# Altium PCB Prod_V2.PcbDoc
Units mil, origin at the board's own origin, x right, y up, seen from the top; angles counter-clockwise.
Board outline 4635 x 4495 mil, 2 copper layers (Top Layer, Bottom Layer); 140 components, 0 nets, 480 pads, 120 vias.
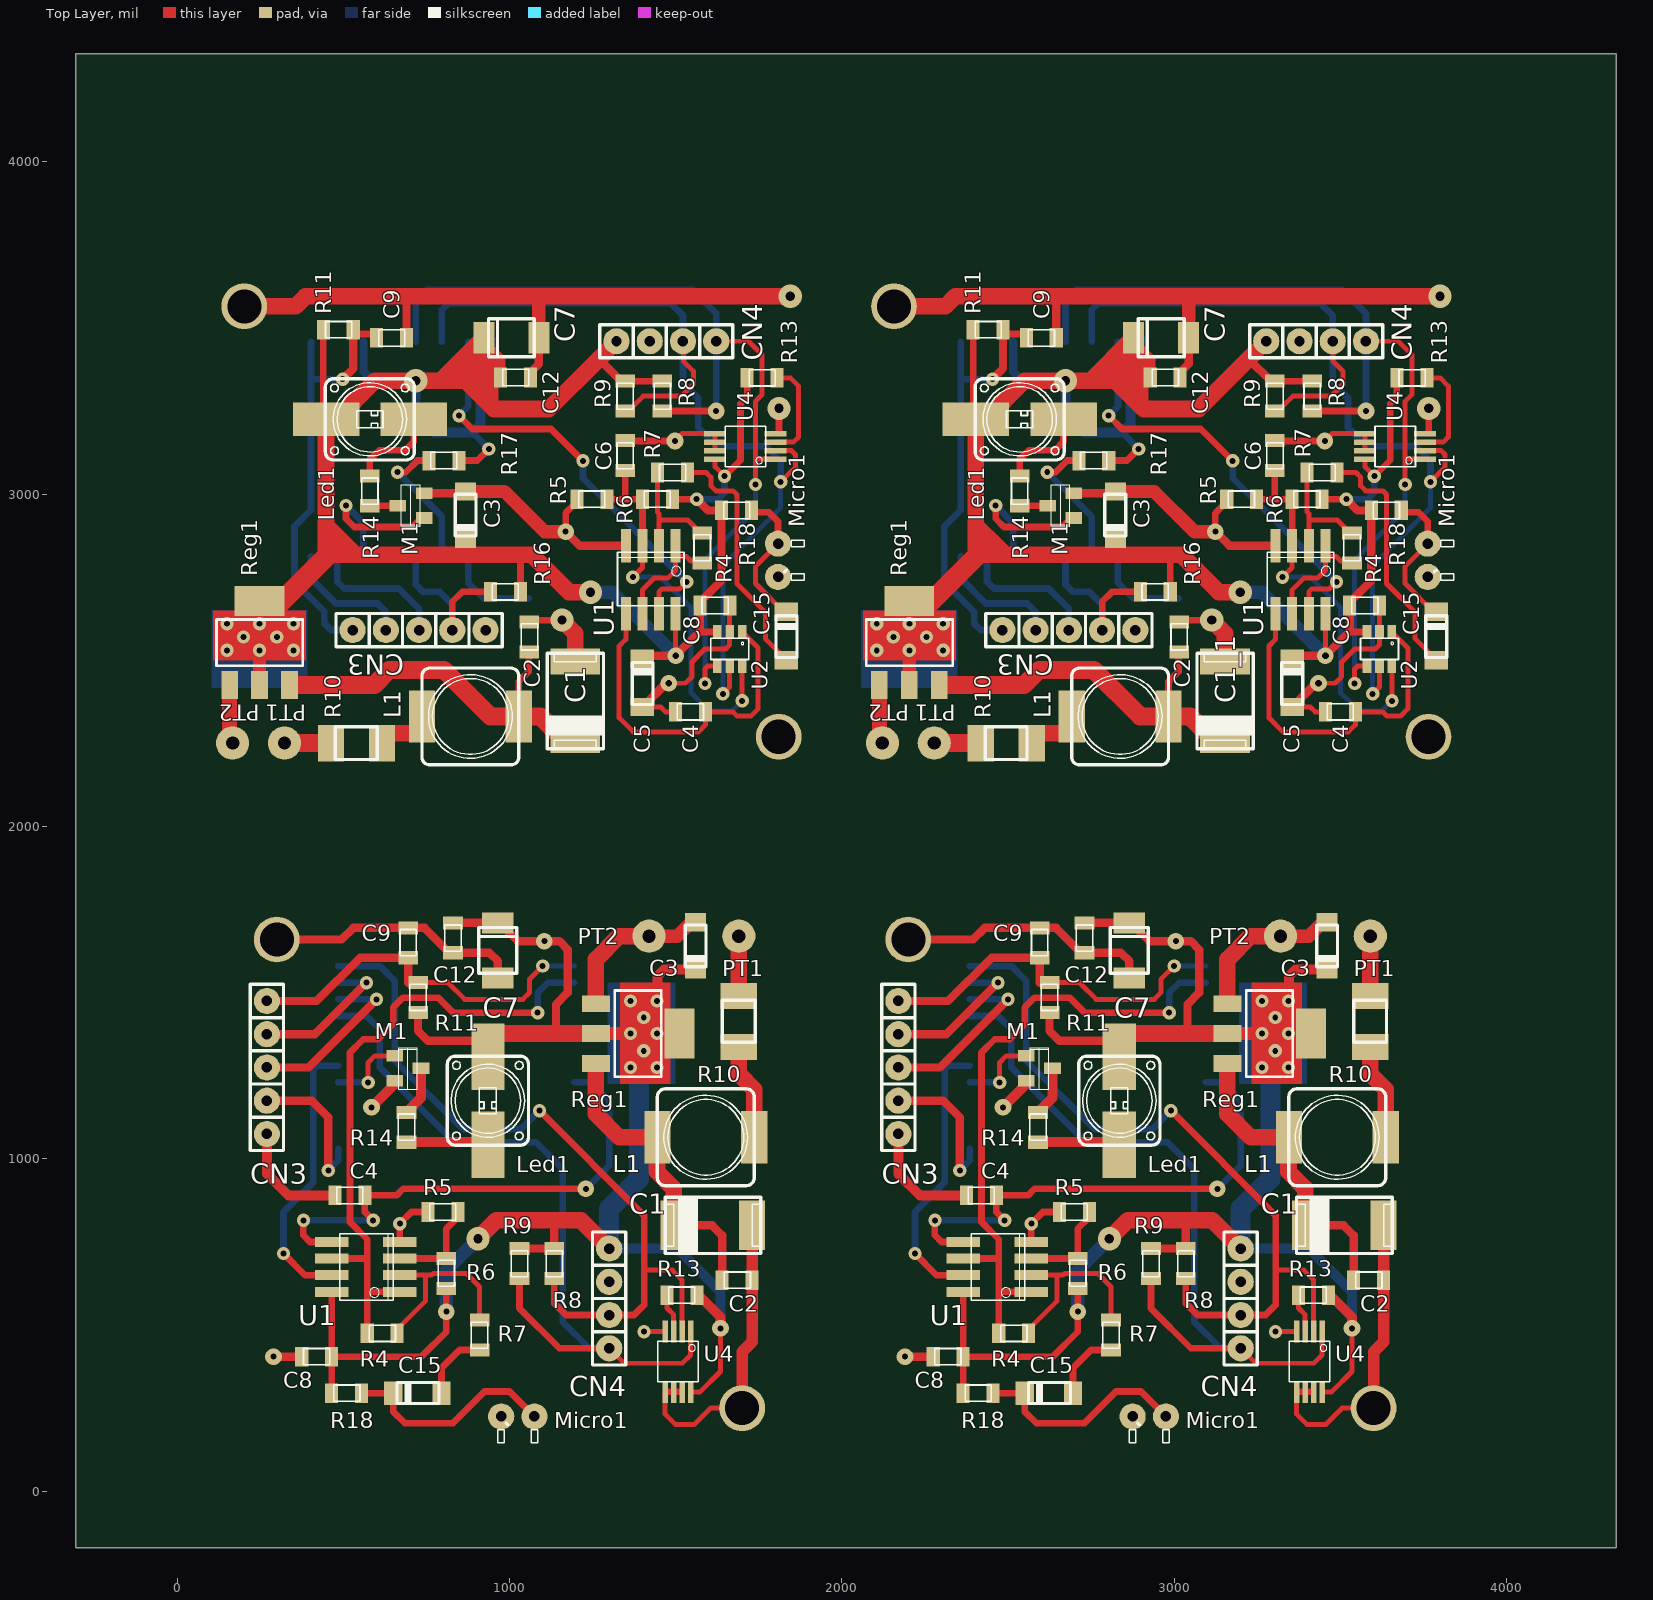
[diagram p0: Top Layer view]
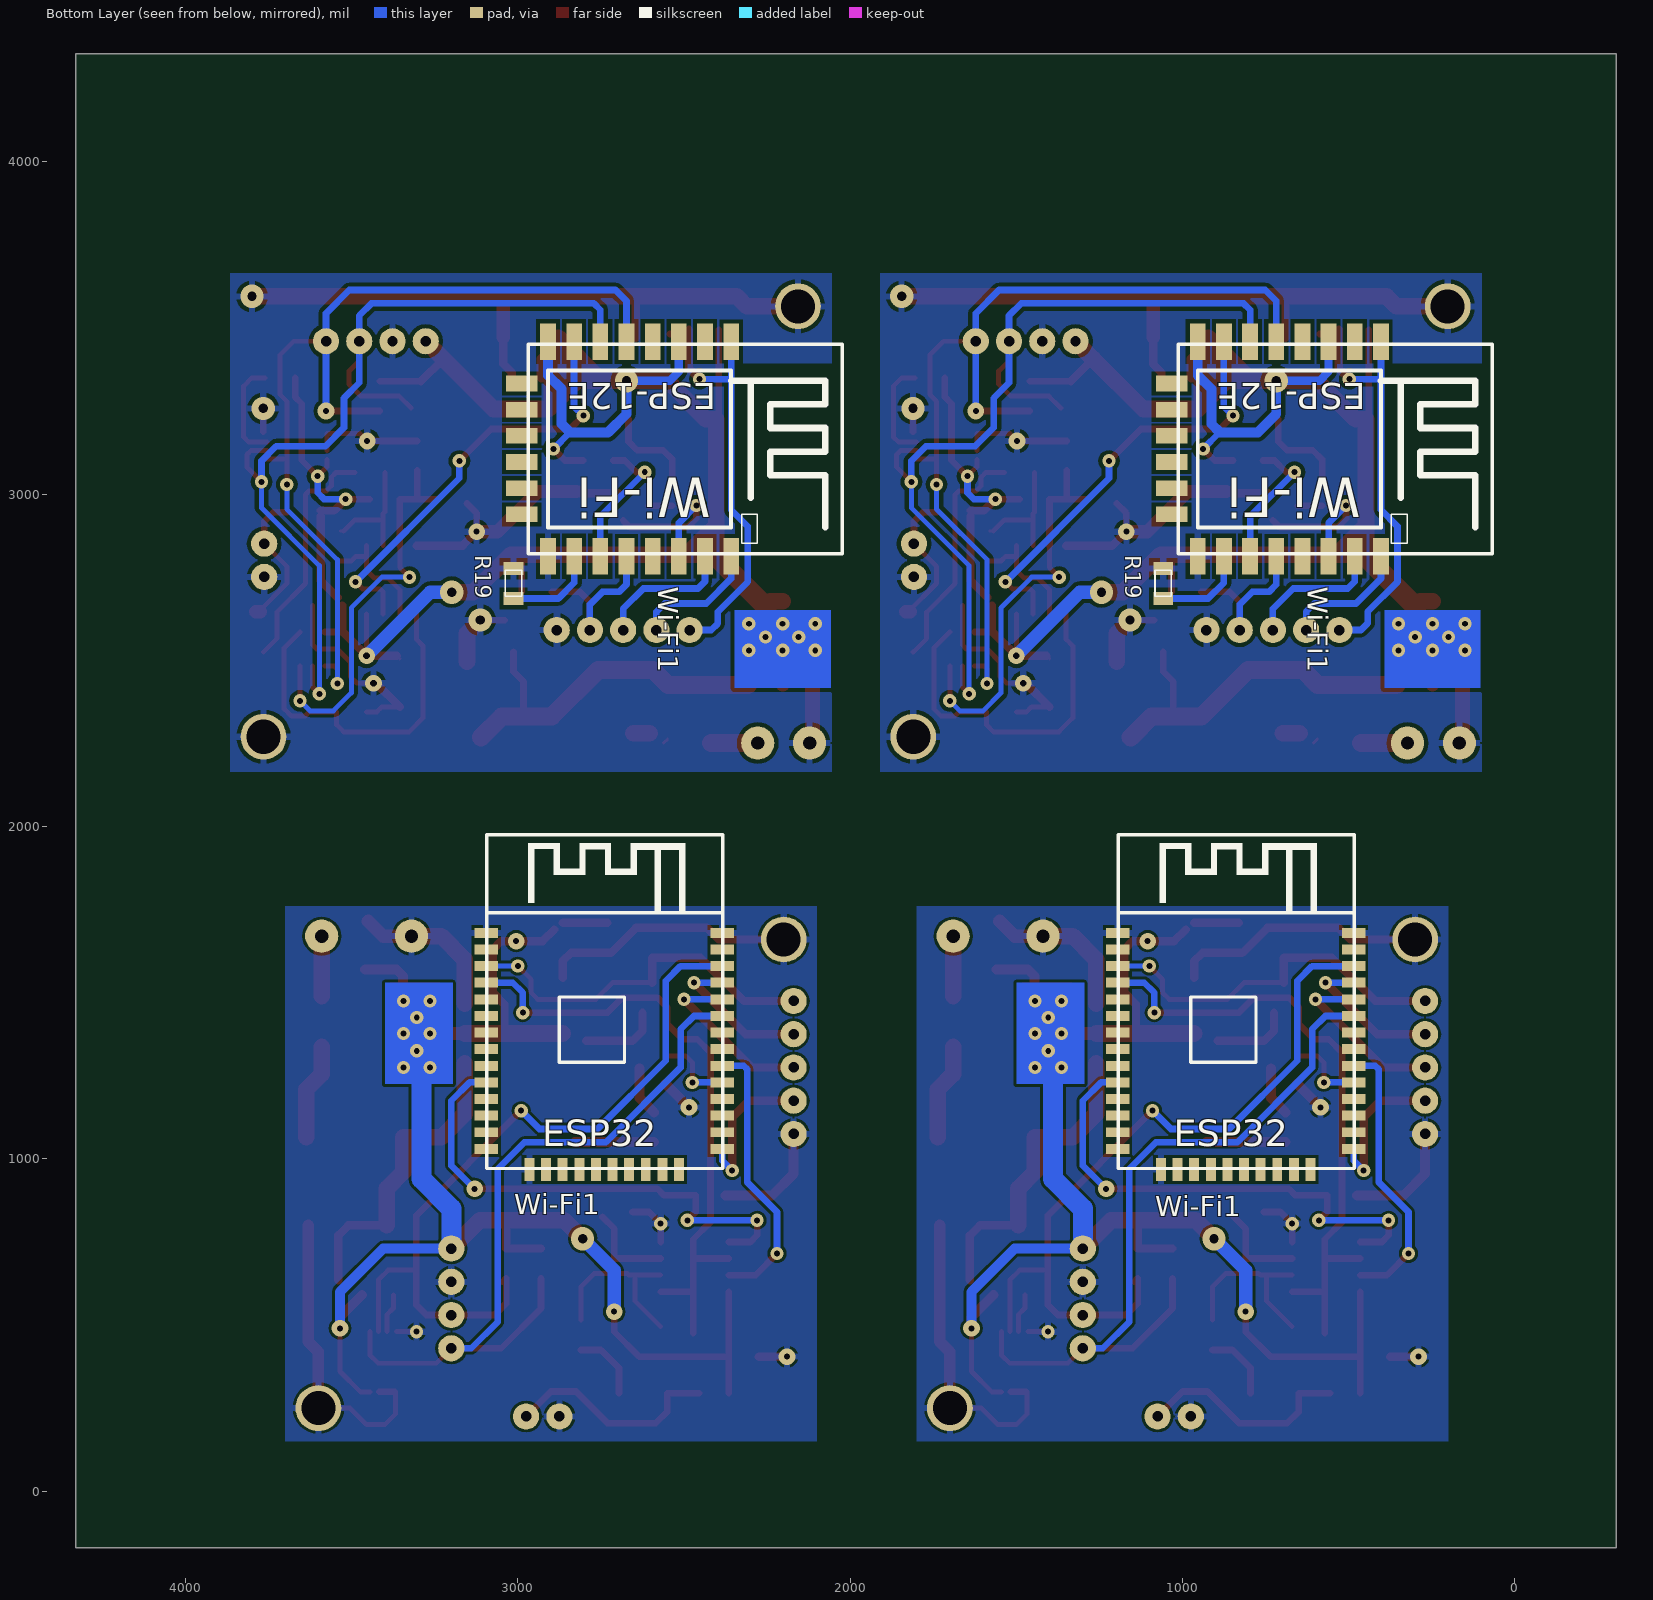
[diagram p1: Bottom Layer view, seen from below]

## Layer stack, top to bottom
Top Layer: signal copper 1.4
Dielectric: dielectric 12.6, FR-4, Dk 4.8
Bottom Layer: signal copper 1.4

## Board outline
-305,-170 -305,4325 4330,4325 4330,-170

## Design rules (kind name [scope] priority, off if disabled: settings)
AssemblyTestPointUsage [All] p1 off:
AssemblyTestpoint [All] p1 off: testpointundercomponent=TRUE minsize=40 maxsize=100 preferedsize=60 minholesize=0 maxholesize=40 preferedholesize=32 testpointgrid=1 usegrid=TRUE gridtolerance=0.01 allowsidetop=TRUE allowsidebottom=TRUE
Clearance [All] p1 off: gap=12
ComponentClearance [All] p1 off: gap=5 collisioncheckmode=3 verticalgap=10 showdistances=FALSE
DiffPairsRouting [All] p1 off: maxlimit=10 minlimit=10 mostfreqgap=10 maxuncoupledlength=500
FabricationTestPointUsage [All] p1 off: valid=0 allowmultiple=FALSE
FabricationTestpoint [All] p1 off: side=3 testpointundercomponent=TRUE minsize=40 maxsize=100 preferedsize=60 minholesize=0 maxholesize=40 preferedholesize=32 testpointgrid=1 allowsidetop=TRUE allowsidebottom=TRUE usegrid=TRUE gridtolerance=0.01
FanoutControl Fanout_BGA [IsBGA] p1 off: bgadir=Out bgaviamode=Centered fanoutstyle=Auto fanoutdirection=Alternating viagrid=1 // Fanout_BGA (Default Rule)
FanoutControl Fanout_LCC [IsLCC] p2 off: bgadir=Out bgaviamode=Centered fanoutstyle=Auto fanoutdirection=Alternating viagrid=1 // Fanout_LCC (Default Rule)
FanoutControl Fanout_SOIC [IsSOIC] p3 off: bgadir=Out bgaviamode=Centered fanoutstyle=Auto fanoutdirection=Alternating viagrid=1 // Fanout_SOIC (Default Rule)
FanoutControl Fanout_Small [(CompPinCount < 5)] p4 off: bgadir=Out bgaviamode=Centered fanoutstyle=Auto fanoutdirection=OutThenIn viagrid=1 // Fanout_Small (Default Rule)
FanoutControl Fanout_Default [All] p5 off: bgadir=Out bgaviamode=Centered fanoutstyle=Auto fanoutdirection=Alternating viagrid=1 // Fanout_Default (Default Rule)
Height [All] p1 off: minheight=0 maxheight=1000 prefheight=500
HoleSize [All] p1 off: absolutevalues=TRUE maxlimit=100 minlimit=1 maxpercent=80.000 minpercent=20.000
PolygonConnect [All] p1: connectstyle=Relief reliefconductorwidth=20 reliefentries=4 polygonreliefangle="90 Angle"
RoomDefinition Son_BU_V2 [InComponentClass('Son_BU_V2')] p1: confinementstyle=ConfineIn formatcopy=TRUE lockcomponents=FALSE outline 4005,-53 4005,4003 -74,4003 -74,-53
RoutingVias [All] p1: holewidth=28 width=50 viastyle="Through Hole" minholewidth=14 minwidth=40 maxholewidth=28 maxwidth=80
SilkscreenOverComponentPads [All] p1: minsilkscreentomaskgap=10
SolderMaskExpansion [All] p1: expansion=5
Width [All] p1: maxlimit=100 minlimit=10 preferedwidth=10
14 further rules are at their usual default settings.

## Classes and differential pairs
component class "Components Class 1": C1 C2 C3 C4 C5 C6 C7 C8 C9 C12 C15 CN3 CN4 L1 Led1 M1 Micro1 PT1 PT2 R4 R5 R6 R7 R8 R9 R10 R11 R13 R14 R16 R18 Reg1 U1 U2 U4 Wi-Fi1

## Components (designator, comment, footprint, x,y, rotation, side; value= is the part's Value field where it differs from the comment)
C1 "220µF/16V" 7343-31 1198,2496 r270 top
C1 "220µF/16V" 7343-31 1730,800 r180 top
C1 "220µF/16V" 7343-31 3630,800 r180 top
C1_1 "220µF/16V" 7343-31 3153,2496 r270 top (schematic designator C1)
C2 "100n" 0805 3015,2615 r270 top
C2 "100n" 0805 1060,2615 r270 top
C2 "100n" 0805 1730,635 r180 top
C2 "100n" 0805 3630,635 r180 top
C3 "10µF/16V" "Tantale 10µF/16V" 2823,2866 r270 top
C3 "10µF/16V" "Tantale 10µF/16V" 868,2866 r270 top
C3 "10µF/16V" "Tantale 10µF/16V" 1560,1570 r270 top
C3 "10µF/16V" "Tantale 10µF/16V" 3460,1570 r270 top
C4 "100n" 0805 3455,2345 r0 top
C4 "100n" 0805 1500,2345 r0 top
C4 "100n" 0805 475,890 r0 top
C4 "100n" 0805 2375,890 r0 top
C5 "10µF/6V3 tantale" "Tantale 10µF/6V3" 3355,2505 r270 top
C5 "10µF/6V3 tantale" "Tantale 10µF/6V3" 1400,2505 r270 top
C6 "10n" 0805 3303,3071 r90 top
C6 "10n" 0805 1348,3071 r90 top
C7 "47µF/10V tantale" "tantale 47µF/10V" 2878,3471 r0 top
C7 "47µF/10V tantale" "tantale 47µF/10V" 923,3471 r0 top
C7 "47µF/10V tantale" "tantale 47µF/10V" 965,1710 r270 top
C7 "47µF/10V tantale" "tantale 47µF/10V" 2865,1710 r270 top
C8 "100n" 0805 3618,2665 r180 top
C8 "100n" 0805 1663,2665 r180 top
C8 "100n" 0805 375,405 r0 top
C8 "100n" 0805 2275,405 r0 top
C9 "100n" 0805 2645,3470 r180 top
C9 "100n" 0805 690,3470 r180 top
C9 "47n" 0805 695,1695 r270 top
C9 "47n" 0805 2595,1695 r270 top
C12 "100n" 0805 3018,3351 r180 top
C12 "100n" 0805 1063,3351 r180 top
C12 "100n" 0805 830,1620 r90 top
C12 "100n" 0805 2730,1620 r90 top
C15 "1µF/16V" 3216-18 3788,2646 r270 top
C15 "1µF/16V" 3216-18 1833,2646 r270 top
C15 "1µF/16V" 3216-18 650,295 r0 top
C15 "1µF/16V" 3216-18 2550,295 r0 top
CN3 "inch_ligne 1x5" INCH_1x5_droit 2483,2591 r0 top
CN3 "inch_ligne 1x5" INCH_1x5_droit 528,2591 r0 top
CN3 "inch_ligne 1x5" INCH_1x5_droit 270,1475 r270 top
CN3 "inch_ligne 1x5" INCH_1x5_droit 2170,1475 r270 top
CN4 "inch_ligne 1x4" INCH_1x4_droit 3277,3460 r0 top
CN4 "inch_ligne 1x4" INCH_1x4_droit 1322,3460 r0 top
CN4 "inch_ligne 1x4" INCH_1x4_droit 1300,730 r270 top
CN4 "inch_ligne 1x4" INCH_1x4_droit 3200,730 r270 top
L1 "70µH CD74R series" "SELF CD74R" 2983,2331 r0 top
L1 "70µH CD74R series" "SELF CD74R" 1028,2331 r0 top
L1 "70µH CD74R series" "SELF CD74R" 1445,1065 r180 top
L1 "70µH CD74R series" "SELF CD74R" 3345,1065 r180 top
Led1 "LTW5AM" LTW5AM 2535,3225 r0 top
Led1 "LTW5AM" LTW5AM 580,3225 r0 top
Led1 "LTW5AM" LTW5AM 935,1175 r270 top
Led1 "LTW5AM" LTW5AM 2835,1175 r270 top
M1 "NTR4501N" "SOT23 (NTR4501)" 2698,2928 r90 top
M1 "NTR4501N" "SOT23 (NTR4501)" 743,2928 r90 top
M1 "NTR4501N" "SOT23 (NTR4501)" 655,1310 r270 top
M1 "NTR4501N" "SOT23 (NTR4501)" 2555,1310 r270 top
Micro1 "Electret" "Micro_electret simple" 3763,2851 r90 top
Micro1 "Electret" "Micro_electret simple" 1808,2851 r90 top
Micro1 "Electret" "Micro_electret simple" 1075,225 r0 top
Micro1 "Electret" "Micro_electret simple" 2975,225 r0 top
PT1 "+ Alim" "Pointe de test"#1 2278,2251 r90 top
PT1 "+ Alim" "Pointe de test"#1 323,2251 r90 top
PT1 "+ Alim" "Pointe de test"#2 1660,1675 r0 top
PT1 "+ Alim" "Pointe de test"#2 3560,1675 r0 top
PT2 "- Alim" "Pointe de test"#3 2118,2251 r90 top
PT2 "- Alim" "Pointe de test"#3 163,2251 r90 top
PT2 "- Alim" "Pointe de test"#4 1494,1675 r0 top
PT2 "- Alim" "Pointe de test"#4 3394,1675 r0 top
R4 "100K" 0805 3535,2883 r270 top
R4 "100K" 0805 1580,2883 r270 top
R4 "100K" 0805 662,475 r180 top
R4 "100K" 0805 2562,475 r180 top
R5 "10K" 0805 3158,2985 r0 top
R5 "10K" 0805 1203,2985 r0 top
R5 "10K" 0805 755,840 r0 top
R5 "10K" 0805 2655,840 r0 top
R6 "10K" 0805 3355,2985 r0 top
R6 "10K" 0805 1400,2985 r0 top
R6 "10K" 0805 810,700 r270 top
R6 "10K" 0805 2710,700 r270 top
R7 "1K" 0805 3490,3065 r180 top
R7 "1K" 0805 1535,3065 r180 top
R7 "1K" 0805 910,425 r90 top
R7 "1K" 0805 2810,425 r90 top
R8 "10K" 0805 3415,3250 r90 top
R8 "10K" 0805 1460,3250 r90 top
R8 "10K" 0805 1135,640 r90 top
R8 "10K" 0805 3035,640 r90 top
R9 "10K" 0805 3303,3250 r90 top
R9 "10K" 0805 1348,3250 r90 top
R9 "10K" 0805 1030,640 r90 top
R9 "10K" 0805 2930,640 r90 top
R10 "0R33" 1210 2418,2251 r0 top
R10 "0R33" 1210 463,2251 r0 top
R10 "0R33" 1210 1690,1490 r270 top
R10 "0R33" 1210 3590,1490 r270 top
R11 "10K" 0805 2485,3495 r180 top
R11 "10K" 0805 530,3495 r180 top
R11 "10K" 0805 725,1530 r270 top
R11 "10K" 0805 2625,1530 r270 top
R13 "10K" 0805 3760,3350 r180 top
R13 "10K" 0805 1805,3350 r180 top
R13 "10K" 0805 1474,590 r0 top
R13 "10K" 0805 3374,590 r0 top
R14 "68" 0805 2535,2965 r90 top
R14 "68" 0805 580,2965 r90 top
R14 "68" 0805 690,1140 r270 top
R14 "68" 0805 2590,1140 r270 top
R16 "10K" 0805 2898,2706 r0 top
R16 "10K" 0805 943,2706 r0 top
R17 "10K" 0805 2713,3101 r0 top
R17 "10K" 0805 758,3101 r0 top
R18 "2K" 0805 3683,2951 r180 top
R18 "2K" 0805 1728,2951 r180 top
R18 "2K" 0805 555,295 r180 top
R18 "2K" 0805 2455,295 r180 top
R19 "2K2" 0805 3013,2776 r270 bottom
R19 "2K2" 0805 1058,2776 r270 bottom
Reg1 "LM1117" SOT223 2113,2426 r0 top
Reg1 "LM1117" SOT223 158,2426 r0 top
Reg1 "LM1117" SOT223 1260,1467 r270 top
Reg1 "LM1117" SOT223 3160,1467 r270 top
U1 "AD8052" SOIC08 3455,2845 r270 top
U1 "AD8052" SOIC08 1500,2845 r270 top
U1 "AD8052" SOIC08 670,600 r180 top
U1 "AD8052" SOIC08 2570,600 r180 top
U2 "MCP4706" SOT23-6 3655,2585 r270 top
U2 "MCP4706" SOT23-6 1700,2585 r270 top
U4 "MCP9808" MSOP-08 3755,3105 r180 top
U4 "MCP9808" MSOP-08 1800,3105 r180 top
U4 "MCP9808" MSOP-08 1545,480 r270 top
U4 "MCP9808" MSOP-08 3445,480 r270 top
Wi-Fi1 "ESP-12E" ESP-12E 2358,3451 r270 bottom
Wi-Fi1 "ESP-12E" ESP-12E 403,3451 r270 bottom
Wi-Fi1 "ESP32" ESP32 1195,1030 r180 bottom
Wi-Fi1 "ESP32" ESP32 3095,1030 r180 bottom

## Footprints (in the part's own frame and the unit in brackets; to place one, negate y for a bottom-side part, rotate by r counter-clockwise, add the part's x,y. Pads: shape width x height; smd on the part's side, far side on the other; paste and mask are expansions set on the pad)
0805 [mm] "résistance CMS"
  rect 1x1.5 smd: 1(0,0) 2(2.286,0)
  silkscreen extent 0.13,-0.63 2.13,0.63
1210 [mm] "résistance CMS 0,5W ERJ14B"
  rect 2x2.8 smd: 1(0,0) 2(3.9,0)
  silkscreen extent 0.33,-1.26 3.53,1.24
3216-18 [mm] "condensateur tantale CMS (3,2 x 1,6 x 1,6)"
  rect 1.4x1.8 smd: 1(0,0) 2(3.7,0)
  silkscreen extent 0.3,-0.79 3.5,0.81
7343-31 [mm] "condensateur tantale CMS (7,3 x 4,3 x 3,0)"
  rect 2x3.8 smd: 1(6,0) 2(0,0)
  silkscreen extent -0.65,-2.15 6.65,2.15
ESP32 [mil] "module Wi-Fi"
  rect 70x30 smd: 1(0,650) 2(0,600) 3(0,550) 4(0,500) 5(0,450) 6(0,400) 7(0,350) 8(0,300) 9(0,250) 10(0,200) 11(0,150) 12(0,100) 13(0,50) 14(0,0) 25(710,0) 26(710,50) 27(710,100) 28(710,150) 29(710,200) 30(710,250) 31(710,300) 32(710,350) 33(710,400) 34(710,450) 35(710,500) 36(710,550) 37(710,600) 38(710,650)
  rect 30x70 smd: 15(130,-62) 16(180,-62) 17(230,-62) 18(280,-62) 19(330,-62) 20(380,-62) 21(430,-62) 22(480,-62) 23(530,-62) 24(580,-62)
  silkscreen extent 2,-59 712,945
ESP-12E [mm] "module Wi-Fi"
  rect 2.8x1.2 smd: 1(-0.2,0) 2(-0.2,-2) 3(-0.2,-4) 4(-0.2,-6) 5(-0.2,-8) 6(-0.2,-10) 7(-0.2,-12) 8(-0.2,-14) 15(16.2,-14) 16(16.2,-12) 17(16.2,-10) 18(16.2,-8) 19(16.2,-6) 20(16.2,-4) 21(16.2,-2) 22(16.2,0)
  rect 1.2x2.4 smd: 9(3,-16) 10(5,-16) 11(7,-16) 12(9,-16) 13(11,-16) 14(13,-16)
  silkscreen extent 0,-15.5 16,8.5
INCH_1x4_droit [mm] "simple rangée 2,54 mm"
  round 2 hole 0.8: 1(0,0) 2(2.54,0) 3(5.08,0) 4(7.62,0)
  silkscreen extent -1.27,-1.27 8.89,1.27
INCH_1x5_droit [mm] "simple rangée 2,54 mm"
  round 2 hole 0.8: 1(0,0) 2(2.54,0) 3(5.08,0) 4(7.62,0) 5(10.16,0)
  silkscreen extent -1.27,-1.27 11.43,1.27
LTW5AM [mil] "LED golden dragon"
  rect 200x100 smd: 1(-132,0) 2(132,0)
  silkscreen extent -134,-122 134,122
"Micro_electret simple" [mm] "Microphone coudé sur PCB sans sérigraphie"
  round 2 hole 0.8: 0(-2.54,0) 1(0,0)
  silkscreen extent -2.79,-2 0.25,-0.51
MSOP-08 [mil] "boîtier DGK"
  rect 66x17 smd: 1(0,0) 2(0,-25.59) 3(0,-51.18) 4(0,-76.77) 5(181.1,-76.77) 6(181.1,-51.18) 7(181.1,-25.59) 8(181.1,0)
  silkscreen extent 29,-99 151,23
"Pointe de test"#1 [mil] "Farnell 133-6225"
  round 100 hole 40: 1(0,0)
"Pointe de test"#2 [mil] "Farnell 133-6225"
  round 100 hole 40: 1(30,-5)
"Pointe de test"#3 [mil] "Farnell 133-6225"
  round 100 hole 40: 1(0,-4)
"Pointe de test"#4 [mil] "Farnell 133-6225"
  round 100 hole 40: 1(-74,-5)
"SELF CD74R" [mm] "Self 7,4 x 7,4"
  rect 2x4 smd: 1(0,0) 2(-7.4,0)
  silkscreen extent -7.4,-3.7 0,3.7
SOIC08 [mil]
  rect 100x30 smd: 1(0,0) 2(0,-50) 3(0,-100) 4(0,-150) 5(205,-150) 6(205,-100) 7(205,-50) 8(205,0)
  silkscreen extent 20,-175 181,25
"SOT23 (NTR4501)" [mil] "D->1 G->2 S->3"
  rect 35x50 smd: 1(37.4,78.74) 2(0,0) 3(74.8,0)
  silkscreen extent -25,12 100,68
SOT23-6 [mil]
  rect 42x26 smd: 1(0,0) 2(0,-37.4) 3(0,-74.8) 4(102,-74.8) 5(102,-37.4) 6(102,0)
  silkscreen extent 19,-94 83,20
SOT223 [mil] "empreinte générale SOT223"
  rect 50x84.65 smd: 1(0,0) 2(90,0) 3(180,0)
  rect 150x90 smd: 2(90,251.97)
  silkscreen extent -39,57 220,197
"Tantale 10µF/6V3" [mm] "1206 ou 3216-18 (175-4041)"
  rect 1.4x1.8 smd: 1(0,0) 2(3.7,0)
  silkscreen extent 0.3,-0.79 3.5,0.81
"Tantale 10µF/16V" [mm] "1206 ou 3216-18 (145-7461)"
  rect 1.4x1.6 smd: 1(0,0) 2(-3.6,0)
  silkscreen extent -3.4,-0.81 -0.2,0.8
"tantale 47µF/10V" [mm] "1210 ou 3528-21 (175-4168)"
  rect 1.6x2.4 smd: 1(0,0) 2(4.2,0)
  silkscreen extent 0.36,-1.45 3.86,1.45

## Part data
C1 C1 C1 C1_1: library part "tantale 220µF/16V", "253-5290 case 7343-31"
C2 C2 C2 C2 C4 C4 C4 C4 C6 C6 C8 C8 C8 C8 C9 C9 C9 C9 C12 C12 C12 C12: library part Cap_CMS_0805, "CMS 0805"
C3 C3 C3 C3: library part "tantale 10µF/16V", "145-7461 case 3216-18"
C5 C5: library part "tantale 10µF/6V3", "175-4041 ou 145-7412 case 3216-18"
C7 C7 C7 C7: library part "tantale 47µF/10V", "175-4168"
C15 C15 C15 C15: library part "tantale 1µF/16V", "145-7406 case 3216-18"
CN3 CN3 CN3 CN3: library part Inch_1x5_droit, "Inch_1x5_droit"
CN4 CN4 CN4 CN4: library part Inch_1x4_droit, "Inch_1x4_droit"
L1 L1 L1 L1: library part "Self CD74R", "SMT CD74R Aliexpress"
Led1 Led1 Led1 Led1: library part "LTW5AM LED", "LED Golden Dragon Plus"
M1 M1 M1 M1: "MOSFET canal N"
Micro1 Micro1 Micro1 Micro1: library part Microphone_03, "Microphone électret"
PT1 PT1 PT1 PT1 PT2 PT2 PT2 PT2: library part PTEST, "pointe de test CI 133-6225"
R4 R4 R4 R4 R5 R5 R5 R5 R6 R6 R6 R6 R7 R7 R7 R7 R8 R8 R8 R8 R9 R9 R9 R9 R11 R11 R11 R11 R13 R13 R13 R13 R14 R14 R14 R14 R16 R16 R17 R17 R18 R18 R18 R18 R19 R19: library part "Res CMS 0805", "CMS 0805"
R10 R10 R10 R10: library part "Res CMS 1210 ERJ14B", "CMS 1210"
Reg1 Reg1 Reg1 Reg1: library part LM1117/800mA, "Régulateur SOT-223"
U1 U1 U1 U1: "AOP"
U2 U2: library part MCP4706_1, "DAC I2C (RS : 738-7111)"
U4 U4 U4 U4: "Digital temperature Sensor"
Wi-Fi1 Wi-Fi1: "ESP-12E module Wi-Fi"
Wi-Fi1 Wi-Fi1: "ESP32 module µC Bluetooth Wi-Fi"

## Free pads (board coordinates)
  round 137.8 hole 102.36: 1(202,3565) 1(300,1660) 1(2157,3565) 1(2200,1660) 2(1700,250) 2(1810,2270) 2(3600,250) 2(3765,2270)

## Via types
v1: diameter 40, hole 18, Top Layer to Bottom Layer, 86 vias
v2: diameter 50, hole 18, Top Layer to Bottom Layer, 18 vias
v3: diameter 70, hole 28, Top Layer to Bottom Layer, 12 vias
v4: diameter 50, hole 20, Top Layer to Bottom Layer, 4 vias

## Nets (pads, with @x,y where several pads share a name; then routed paths per layer and width w, separated by ;. In a path a pad name is that pad's centre, name@x,y a point inside that pad or via, vN(x,y) a via of type N, cw(c..) or ccw(c..) an arc to the next point about the centre after c; other vN are vias at no path point)
pads on no net: C1.1 C1.2 C1_1.1 C1_1.2 C2.1 C2.2 C3.1 C3.2 C4.1 C4.2 C5.1 C5.2 C6.1 C6.2 C7.1 C7.2 C8.1 C8.2 C9.1 C9.2 C12.1 C12.2 C15.1 C15.2 CN3.1 CN3.2 CN3.3 CN3.4 CN3.5 CN4.1 CN4.2 CN4.3 CN4.4 L1.1 L1.2 Led1.1 Led1.2 M1.1 M1.2 M1.3 Micro1.0 Micro1.1 PT1.1 PT2.1 R4.1 R4.2 R5.1 R5.2 R6.1 R6.2 R7.1 R7.2 R8.1 R8.2 R9.1 R9.2 R10.1 R10.2 R11.1 R11.2 R13.1 R13.2 R14.1 R14.2 R16.1 R16.2 R17.1 R17.2 R18.1 R18.2 R19.1 R19.2 Reg1.1 Reg1.2 Reg1.3 U1.1 U1.2 U1.3 U1.4 U1.5 U1.6 U1.7 U1.8 U2.1 U2.2 U2.3 U2.4 U2.5 U2.6 U4.1 U4.2 U4.3 U4.4 U4.5 U4.6 U4.7 U4.8 Wi-Fi1.1 Wi-Fi1.2 Wi-Fi1.3 Wi-Fi1.4 Wi-Fi1.5 Wi-Fi1.6 Wi-Fi1.7 Wi-Fi1.8 Wi-Fi1.9 Wi-Fi1.10 Wi-Fi1.11 Wi-Fi1.12 Wi-Fi1.13 Wi-Fi1.14 Wi-Fi1.15 Wi-Fi1.16 Wi-Fi1.17 Wi-Fi1.18 Wi-Fi1.19 Wi-Fi1.20 Wi-Fi1.21 Wi-Fi1.22 Wi-Fi1.23 Wi-Fi1.24 Wi-Fi1.25 Wi-Fi1.26 Wi-Fi1.27 Wi-Fi1.28 Wi-Fi1.29 Wi-Fi1.30 Wi-Fi1.31 Wi-Fi1.32 Wi-Fi1.33 Wi-Fi1.34 Wi-Fi1.35 Wi-Fi1.36 Wi-Fi1.37 Wi-Fi1.38
copper on no net: | length 100548.6
  Top Layer w10: 167,2251 188,2272 ; 594.54,2263 605.88,2251.66 ; 1400,2505 1409,2514 ; v4@1471.67,2431 v4(1479,2431) ; 1569,2889 1580,2889 ; v1@1643,2399 v1@1649,2405 ; 1662.6,2664.6 1663,2665 ; 2122,2251 2143,2272 ; 2549.54,2263 2560.88,2251.66 ; 3355,2505 3364,2514 ; v4@3426.67,2431 v4(3434,2431) ; 3524,2889 3535,2889 ; v1@3598,2399 v1@3604,2405 ; 3617.6,2664.6 3618,2665
  Top Layer w15: v1(575,1230) 575,1290 595,1310 655,1310 ; 670,495 747,572 747,650 ; 670,650 747,650 ; 695,1530 725,1530 815,1530 865,1480 1040,1480 1060,1500 1060,1540 v1(1100,1580) ; 910,515 910,615 870,655 771,655 766,650 747,650 ; 1300,430 1345,385 1520,385 1545,410 1545,480 ; 1350,2640 1350,2563 1330,2543 1330,2327 1372,2285 1569,2285 1590,2306 1590,2345 1672,2345 1685,2332 1726,2332 1748,2354 1748,2537 1700,2585 ; 1366,3259 1402,3295 1517,3295 1553,3331 1553,3370 1523,3400 1523,3443 ; v1(1371,2750) 1400,2779 1400,2845 ; 1400,2359.33 1454.67,2359.33 1469,2345 1500,2345 ; 1400,2640 1400,2712 1435,2747 1476,2747 1500,2771 1500,2845 ; v1(1405,480) 1464.82,480 ; 1405,665 1490,665 1519.41,635.59 1519.41,480 ; 1445,3065 1445,2946 1450,2941 1450,2922 ; 1450,2640 1450,2706 1459,2715 1512,2715 v1(1533,2736) ; 1450,2845 1450,2922 ; 1468.23,298.9 1468.23,231.77 1500,200 1555,200 1605,250 1700,250 ; 1474,590 1474,551 1493.82,531.18 1493.82,480 ; v4(1479,2431) 1529,2431 1549,2451 1549,2495 1588,2534 1650,2534 1662.6,2546.6 1662.6,2585 1662.6,2664.6 ; v2(1498,3160) 1519.77,3181.77 1618.9,3181.77 1618.9,3156.18 1618.9,3130.59 ; v4(1500,2514) 1500,2640 ; 1509,2813 1532,2813 1546,2799 1580,2799 ; 1535,3065 1592,3065 1606,3051 1606,3025 1621,3010 1673,3010 1684,2999 1684,2731 1770,2645 1770,2565 1810.5,2524.5 ; 1545,298.9 1573.9,298.9 1635,360 v2(1635,490) ; 1569,2889 1536,2922 1450,2922 ; v1(1588,2430) 1588,2474 1597,2483 1625.2,2483 ; 1618.9,3104.09 1618.9,3082.1 v1(1647,3054) ; 1622,3460 1719,3460 1760,3419 1760,3299 1740,3279 1740,3105 ; v1(1642,2399) 1662.6,2419.6 1662.6,2483 ; v1(1700,2378) 1700,2483 ; v1(1740,3029) 1740,3105 ; 1800,3105 1740,3105 ; 1800,3130.59 1848.41,3130.59 1860,3119 1860,3081 v1(1816,3037) ; 1800,3156.18 1854.18,3156.18 1870,3172 1870,3325 1845,3350 1805,3350 ; 1808,2851 1740,2783 1740,2730.86 1824.86,2646 ; v1(2475,1230) 2475,1290 2495,1310 2555,1310 ; 2570,495 2647,572 2647,650 ; 2570,650 2647,650 ; 2595,1530 2625,1530 2715,1530 2765,1480 2940,1480 2960,1500 2960,1540 v1(3000,1580) ; 2810,515 2810,615 2770,655 2671,655 2666,650 2647,650 ; 3200,430 3245,385 3420,385 3445,410 3445,480 ; v1(3305,480) 3364.82,480 ; 3305,665 3390,665 3419.41,635.59 3419.41,480 ; 3305,2640 3305,2563 3285,2543 3285,2327 3327,2285 3524,2285 3545,2306 3545,2345 3627,2345 3640,2332 3681,2332 3703,2354 3703,2537 3655,2585 ; 3321,3259 3357,3295 3472,3295 3508,3331 3508,3370 3478,3400 3478,3443 ; v1(3326,2750) 3355,2779 3355,2845 ; 3355,2359.33 3409.67,2359.33 3424,2345 3455,2345 ; 3355,2640 3355,2712 3390,2747 3431,2747 3455,2771 3455,2845 ; 3368.23,298.9 3368.23,231.77 3400,200 3455,200 3505,250 3600,250 ; 3374,590 3374,551 3393.82,531.18 3393.82,480 ; 3400,3065 3400,2946 3405,2941 3405,2922 ; 3405,2640 3405,2706 3414,2715 3467,2715 v1(3488,2736) ; 3405,2845 3405,2922 ; v4(3434,2431) 3484,2431 3504,2451 3504,2495 3543,2534 3605,2534 3617.6,2546.6 3617.6,2585 3617.6,2664.6 ; 3445,298.9 3473.9,298.9 3535,360 v2(3535,490) ; v2(3453,3160) 3474.77,3181.77 3573.9,3181.77 3573.9,3156.18 3573.9,3130.59 ; v4(3455,2514) 3455,2640 ; 3464,2813 3487,2813 3501,2799 3535,2799 ; 3490,3065 3547,3065 3561,3051 3561,3025 3576,3010 3628,3010 3639,2999 3639,2731 3725,2645 3725,2565 3765.5,2524.5 ; 3524,2889 3491,2922 3405,2922 ; v1(3543,2430) 3543,2474 3552,2483 3580.2,2483 ; 3573.9,3104.09 3573.9,3082.1 v1(3602,3054) ; 3577,3460 3674,3460 3715,3419 3715,3299 3695,3279 3695,3105 ; v1(3597,2399) 3617.6,2419.6 3617.6,2483 ; v1(3655,2378) 3655,2483 ; v1(3695,3029) 3695,3105 ; 3755,3105 3695,3105 ; 3755,3130.59 3803.41,3130.59 3815,3119 3815,3081 v1(3771,3037) ; 3755,3156.18 3809.18,3156.18 3825,3172 3825,3325 3800,3350 3760,3350 ; 3763,2851 3695,2783 3695,2730.86 3779.86,2646
  Top Layer w20: v1(320,715) 385,650 465,650 ; v1(380,815) 380,770 400,750 465,750 440,750 ; 440,3233 440,3495 ; 465,295 465,405 ; 465,600 465,405 ; 465,700 572,700 ; v1(508,2966) 508,2926 533,2901 708,2901 728,2921 ; 542,3482 587,3482 ; 555,295 650,295 650,240 685,205 830,205 925,300 1000,300 1075,225 ; 572,475 572,700 ; 577,600 670,600 ; 580,2965 653,2965 ; 580,3055 580,3104 608,3132 686,3132 712,3158 712,3225 ; v1(590,815) 565,840 565,890 660,890 680,910 v2(1230,910) ; v1(663,3066) 688,3066 723,3101 758,3101 ; 670,700 810,700 810,790 845,825 ; 670,750 v1(670,805) 705,840 755,840 ; 795.67,295 795.67,370.67 850,425 910,425 ; 810,610 v2(810,540) 810,480 735,405 465,405 ; 828,2591 828,2676 858,2706 943,2706 ; 848,3101 903,3101 v1(938,3136) ; v1@848,3238 v1(848,3236) 888,3196 1125,3196 v1(1221,3100) ; 1028,2331 1028,2436 1058,2466 1058,2525 ; 1030,640 1030,550 1150,430 1300,430 ; 1033,2706 1033,2817 ; v1(1085,1440) 830,1440 785,1485 680,1485 650,1455 650,1405 605,1360 560,1360 520,1320 520,810 572,758 572,700 ; 1085,2621 v3(1158,2621) ; v1(1090,1145) 1405,830 1405,665 1405,560 1375,530 1300,530 1170,530 1135,565 1135,640 1145,630 ; v2(1169,2887) 1169,2943 1198,2972 ; 1293,2985 1400,2985 1400,2845 ; 1336,3340 1348,3340 1460,3340 ; 1348,2988 1348,3071 ; 1348,3160 v2(1498,3160) ; 1460,3250 v2(1622,3250) ; 1470,298.9 1493.82,298.9 1516,298.9 ; 1490,2985 v1(1563,2985) ; 1571,2585 1625.2,2585 ; v1(1647,3054) 1695,3102 1695,3272 1715,3292 1715,3350 ; 1740,2945 1781,2945 1808,2918 1808,2851 ; 1811,3188 v3(1811,3258) ; v1(2220,715) 2285,650 2365,650 ; v1(2280,815) 2280,770 2300,750 2365,750 2340,750 ; 2365,295 2365,405 ; 2365,600 2365,405 ; 2365,700 2472,700 ; 2395,3233 2395,3495 ; 2455,295 2550,295 2550,240 2585,205 2730,205 2825,300 2900,300 2975,225 ; v1(2463,2966) 2463,2926 2488,2901 2663,2901 2683,2921 ; 2472,475 2472,700 ; 2477,600 2570,600 ; v1(2490,815) 2465,840 2465,890 2560,890 2580,910 v2(3130,910) ; 2497,3482 2542,3482 ; 2535,2965 2608,2965 ; 2535,3055 2535,3104 2563,3132 2641,3132 2667,3158 2667,3225 ; 2570,700 2710,700 2710,790 2745,825 ; 2570,750 v1(2570,805) 2605,840 2655,840 ; v1(2618,3066) 2643,3066 2678,3101 2713,3101 ; 2695.67,295 2695.67,370.67 2750,425 2810,425 ; 2710,610 v2(2710,540) 2710,480 2635,405 2365,405 ; 2783,2591 2783,2676 2813,2706 2898,2706 ; 2803,3101 2858,3101 v1(2893,3136) ; v1@2803,3238 v1(2803,3236) 2843,3196 3080,3196 v1(3176,3100) ; 2930,640 2930,550 3050,430 3200,430 ; 2983,2331 2983,2436 3013,2466 3013,2525 ; v1(2985,1440) 2730,1440 2685,1485 2580,1485 2550,1455 2550,1405 2505,1360 2460,1360 2420,1320 2420,810 2472,758 2472,700 ; 2988,2706 2988,2817 ; v1(2990,1145) 3305,830 3305,665 3305,560 3275,530 3200,530 3070,530 3035,565 3035,640 3045,630 ; 3040,2621 v3(3113,2621) ; v2(3124,2887) 3124,2943 3153,2972 ; 3248,2985 3355,2985 3355,2845 ; 3291,3340 3303,3340 3415,3340 ; 3303,2988 3303,3071 ; 3303,3160 v2(3453,3160) ; 3370,298.9 3393.82,298.9 3416,298.9 ; 3415,3250 v2(3577,3250) ; 3445,2985 v1(3518,2985) ; 3526,2585 3580.2,2585 ; v1(3602,3054) 3650,3102 3650,3272 3670,3292 3670,3350 ; 3695,2945 3736,2945 3763,2918 3763,2851 ; 3766,3188 v3(3766,3258)
  Top Layer w25: 270,1175 405,1175 455,1125 v1(455,965) ; 270,1275 395,1275 v1(600,1480) ; 270,1375 415,1375 v1(570,1530) ; 270,1475 420,1475 550,1605 695,1605 695,1530 ; v2(290,405) 375,405 ; 300,1660 495,1660 530,1695 695,1695 745,1695 820,1620 830,1620 940,1620 965,1595 965,1544.65 ; v1(498,3346) 530,3378 530,3495 ; 690,3470 690,3595 ; 725,1440 725,1385 755,1355 895,1355 ; 743,3002.8 845,3002.8 ; 830,1710 965,1710 ; 990,1690 1025,1655 v2(1105,1655) 1150,1655 1175,1630 1175,1500 1140,1465 1140,1395 ; 1030,730 1135,730 1135,810 ; 1063,3351 1063,3366 1088.35,3391.35 1088.35,3471 ; v2(1169,2887) 1211,2845 1350,2845 ; 1269,3407 1336,3340 ; 1400,2359.33 v4@1471.67,2431 ; 1409,2514 v4(1500,2514) 1571,2585 ; 1495,798.78 1493.78,800 1610,800 1640,770 1640,635 ; v1(1563,2985) 1597,2951 1638,2951 ; 1573,2587 1573,2665 ; 1587,2689 1638,2740 1638,2933 ; 2170,1175 2305,1175 2355,1125 v1(2355,965) ; 2170,1275 2295,1275 v1(2500,1480) ; 2170,1375 2315,1375 v1(2470,1530) ; 2170,1475 2320,1475 2450,1605 2595,1605 2595,1530 ; v2(2190,405) 2275,405 ; 2200,1660 2395,1660 2430,1695 2595,1695 2645,1695 2720,1620 2730,1620 2840,1620 2865,1595 2865,1544.65 ; v1(2453,3346) 2485,3378 2485,3495 ; 2625,1440 2625,1385 2655,1355 2795,1355 ; 2645,3470 2645,3595 ; 2698,3002.8 2800,3002.8 ; 2730,1710 2865,1710 ; 2890,1690 2925,1655 v2(3005,1655) 3050,1655 3075,1630 3075,1500 3040,1465 3040,1395 ; 2930,730 3035,730 3035,810 ; 3018,3351 3018,3366 3043.35,3391.35 3043.35,3471 ; v2(3124,2887) 3166,2845 3305,2845 ; 3224,3407 3291,3340 ; 3355,2359.33 v4@3426.67,2431 ; 3364,2514 v4(3455,2514) 3526,2585 ; 3395,798.78 3393.78,800 3510,800 3540,770 3540,635 ; v1(3518,2985) 3552,2951 3593,2951 ; 3528,2587 3528,2665 ; 3542,2689 3593,2740 3593,2933
  Top Layer w30: 270,1075 270,955 335,890 475,890 ; v2(585,1155) 655,1225 ; 690,1050 928,1050 ; 690,1140 733.74,1183.74 733.74,1272.6 ; 935.5,3443.5 973,3406 973,3351 ; 1445,1515 1445,1550 1465,1570 1560,1570 ; 1569,590 1635,524 v2(1635,490) ; 2170,1075 2170,955 2235,890 2375,890 ; v2(2485,1155) 2555,1225 ; 2590,1050 2828,1050 ; 2590,1140 2633.74,1183.74 2633.74,1272.6 ; 2890.5,3443.5 2928,3406 2928,3351 ; 3345,1515 3345,1550 3365,1570 3460,1570 ; 3469,590 3535,524 v2(3535,490)
  Top Layer w35: 1700,250 1700,420 1730,450 1730,635 1730,800 ; 3600,250 3600,420 3630,450 3630,635 3630,800
  Top Layer w40: 248,2426 v1(248,2530) ; 868,3007.73 985.27,3007.73 1106,2887 v2(1169,2887) ; 1088.35,3471 1088.35,3594.65 ; 1260,1377 v1(1364,1377) ; 1420,1670 1505,1670 1550,1715 ; 1819.13,2646 1824.86,2646 1833,2646 ; 2203,2426 v1(2203,2530) ; 2823,3007.73 2940.27,3007.73 3061,2887 v2(3124,2887) ; 3043.35,3471 3043.35,3594.65 ; 3160,1377 v1(3264,1377) ; 3320,1670 3405,1670 3450,1715 ; 3774.13,2646 3779.86,2646 3788,2646
  Top Layer w45: 158,2281 158,2426 ; 2113,2281 2113,2426
  Top Layer w50: 202,3565 356,3565 386,3595 690,3595 v3(1845,3595) ; 248,2677.97 284.97,2677.97 ; 479,2842 512,2842 ; 648,2281 698,2281 ; 843,3366 953,3256 1118,3256 1269,3407 1322,3460 ; v3(905,760) 960,815 1215,815 1300,730 ; 923,3471 793,3341 v3(718,3341) 595,3341 479,3225 448,3225 448,2906 512,2842 ; 965,1377 1260,1377 ; 1033,2817 1034,2818 ; v3(1158,2621) 1198,2581 1198,2496 ; v3(1244,2705) 1179,2705 1066,2818 1034,2818 ; 1260,1287 1260,1135 1330,1065 1445,1065 ; 1260,1467 1260,1600 1330,1670 1420,1670 ; 1443.78,1063.78 1443.78,961.22 1493.78,911.22 1493.78,800 ; 1690,1336.46 1690,1255 1736.34,1208.66 1736.34,1065 ; 1690,1490 1690,1670 ; 2157,3565 2311,3565 2341,3595 2645,3595 v3(3800,3595) ; 2203,2677.97 2239.97,2677.97 ; 2434,2842 2467,2842 ; 2603,2281 2653,2281 ; 2798,3366 2908,3256 3073,3256 3224,3407 3277,3460 ; v3(2805,760) 2860,815 3115,815 3200,730 ; 2865,1377 3160,1377 ; 2878,3471 2748,3341 v3(2673,3341) 2550,3341 2434,3225 2403,3225 2403,2906 2467,2842 ; 2988,2817 2989,2818 ; v3(3113,2621) 3153,2581 3153,2496 ; 3160,1287 3160,1135 3230,1065 3345,1065 ; 3160,1467 3160,1600 3230,1670 3320,1670 ; v3(3199,2705) 3134,2705 3021,2818 2989,2818 ; 3343.78,1063.78 3343.78,961.22 3393.78,911.22 3393.78,800 ; 3590,1336.46 3590,1255 3636.34,1208.66 3636.34,1065 ; 3590,1490 3590,1670 ; 512,2842 536,2818 1034,2818 ; 2467,2842 2491,2818 2989,2818
  Top Layer w55: 323,2251 463,2251 ; 356,2426 593,2426 638,2471 803,2471 943,2331 1028,2331 1093,2331 1155.5,2268.5 ; 2278,2251 2418,2251 ; 2308,2426 2548,2426 2593,2471 2758,2471 2898,2331 2983,2331 3048,2331 3110.5,2268.5
  Top Layer w60: 295.5,2658.5 479,2842 ; 2250.5,2658.5 2434,2842
  Bottom Layer w15: v1(1100,1580) 1195,1580 ; v1(1371,2750) 1454,2750 1546,2658 1546,2402 1600,2348 1670,2348 v1(1700,2378) ; v1(1588,2430) 1588,2803 1740,2955 v1(1740,3029) ; v1(1642,2399) 1642,2785 1816,2959 v1(1816,3037) ; v1(3000,1580) 3095,1580 ; v1(3326,2750) 3409,2750 3501,2658 3501,2402 3555,2348 3625,2348 v1(3655,2378) ; v1(3543,2430) 3543,2803 3695,2955 v1(3695,3029) ; v1(3597,2399) 3597,2785 3771,2959 v1(3771,3037)
  Bottom Layer w20: v1(320,715) 320,840 410,930 410,1270 420,1280 485,1280 ; v1(380,815) v1(590,815) ; 403,2813.2 403,2746 478,2671 603,2671 628,2646 628,2591 ; 403,3458.87 403,3346 ; v1(455,965) 485,995 485,1030 ; 481.74,2813.2 481.74,2737.26 503,2716 667.05,2716 728,2655.05 728,2591 ; 485,1230 v1(575,1230) ; 485,1430 570,1430 610,1390 610,1275 835,1050 1080,1050 1160,970 1160,510 1240,430 1300,430 ; 485,1480 v1(600,1480) ; 485,1530 v1(570,1530) ; 485,1580 610,1580 655,1535 655,1295 860,1090 1035,1090 v1(1090,1145) ; v1(498,3346) 403,3346 ; v1(508,2966) 560.48,2913.52 560.48,2813.2 ; 528,2591 463,2591 443,2611 443,2646 353,2736 353,2903 403,2953 403,3346 ; v1(663,3066) 796.7,2932.3 796.7,2813.2 ; 717.96,2813.2 717.96,2728.04 740,2706 790,2706 828,2668 828,2591 ; 717.96,3458.87 717.96,3580.96 751,3614 1552,3614 1622,3544 1622,3460 v2(1622,3250) ; 796.7,3458.87 796.7,3554.7 816,3574 1485.19,3574 1522,3537.19 1522,3460 1522,3335 1568,3289 1568,3200 1624,3144 1772,3144 1816,3100 v1(1816,3037) ; v1@848,3238 v1(848,3236) 876,3264 876,3458.87 ; 875.44,2813.2 875.44,2733.56 923,2686 1058,2686 ; 888,3186 v1(938,3136) ; v1(1085,1440) 1085,1500 1115,1530 1195,1530 ; 1195,1230 1245,1230 1300,1175 1300,980 v2(1230,910) ; v1(1221,3100) 1221,3048 v1(1533,2736) ; v1(1563,2985) 1628,2985 1647,3004 v1(1647,3054) ; v1(2220,715) 2220,840 2310,930 2310,1270 2320,1280 2385,1280 ; v1(2280,815) v1(2490,815) ; v1(2355,965) 2385,995 2385,1030 ; 2358,2813.2 2358,2746 2433,2671 2558,2671 2583,2646 2583,2591 ; 2358,3458.87 2358,3346 ; 2385,1230 v1(2475,1230) ; 2385,1430 2470,1430 2510,1390 2510,1275 2735,1050 2980,1050 3060,970 3060,510 3140,430 3200,430 ; 2385,1480 v1(2500,1480) ; 2385,1530 v1(2470,1530) ; 2385,1580 2510,1580 2555,1535 2555,1295 2760,1090 2935,1090 v1(2990,1145) ; 2436.74,2813.2 2436.74,2737.26 2458,2716 2622.05,2716 2683,2655.05 2683,2591 ; v1(2453,3346) 2358,3346 ; v1(2463,2966) 2515.48,2913.52 2515.48,2813.2 ; 2483,2591 2418,2591 2398,2611 2398,2646 2308,2736 2308,2903 2358,2953 2358,3346 ; v1(2618,3066) 2751.7,2932.3 2751.7,2813.2 ; 2672.96,2813.2 2672.96,2728.04 2695,2706 2745,2706 2783,2668 2783,2591 ; 2672.96,3458.87 2672.96,3580.96 2706,3614 3507,3614 3577,3544 3577,3460 v2(3577,3250) ; 2751.7,3458.87 2751.7,3554.7 2771,3574 3440.19,3574 3477,3537.19 3477,3460 3477,3335 3523,3289 3523,3200 3579,3144 3727,3144 3771,3100 v1(3771,3037) ; v1@2803,3238 v1(2803,3236) 2831,3264 2831,3458.87 ; 2830.44,2813.2 2830.44,2733.56 2878,2686 3013,2686 ; 2843,3186 v1(2893,3136) ; v1(2985,1440) 2985,1500 3015,1530 3095,1530 ; 3095,1230 3145,1230 3200,1175 3200,980 v2(3130,910) ; v1(3176,3100) 3176,3048 v1(3488,2736) ; v1(3518,2985) 3583,2985 3602,3004 v1(3602,3054)
  Bottom Layer w25: 560.48,3458.87 560.48,3368.52 588,3341 v3(718,3341) ; 2515.48,3458.87 2515.48,3368.52 2543,3341 v3(2673,3341)
  Bottom Layer w30: v3(718,3341) 718,3241 773,3186 888,3186 913,3211 913,3316 954.18,3357.18 954.18,3458.87 ; 1300,730 1505,730 1635,600 v2(1635,490) ; v3(2673,3341) 2673,3241 2728,3186 2843,3186 2868,3211 2868,3316 2909.18,3357.18 2909.18,3458.87 ; 3200,730 3405,730 3535,600 v2(3535,490)
  Bottom Layer w40: v2(810,540) 810,665 v3(905,760) ; v3(1244,2705) 1309,2705 v4(1500,2514) ; v2(2710,540) 2710,665 v3(2805,760) ; v3(3199,2705) 3264,2705 v4(3455,2514)
  Bottom Layer w60: 1300,730 1300,850 1390,940 1390,1235 ; 3200,730 3200,850 3290,940 3290,1235
  other v1: 1364,1275 1444,1275 3264,1275 3344,1275 1404,1325 3304,1325 1444,1377 3344,1377 1404,1425 3304,1425 1364,1475 1444,1475 3264,1475 3344,1475 150,2530 350,2530 2105,2530 2305,2530 200,2570 300,2570 2155,2570 2255,2570 150,2610 248,2610 350,2610 2105,2610 2203,2610 2305,2610

## Polygon pours and split planes (outlines as drawn)
no net on Bottom Layer "Bottom Layer-No Net" (solid, pour order 1000): 2055,2164 2055,2660 2349,2660 2347,2662 2347,3394 2055,3394 2055,3664 3865,3664 3865,2164 2055,2164
no net on Bottom Layer "Bottom Layer-No Net" (solid, pour order 1000): 100,2164 100,2660 394,2660 392,2662 392,3394 100,3394 100,3664 1910,3664 1910,2164 100,2164
no net on Bottom Layer "Bottom Layer-No Net" (solid, pour order 1000): 200,1760 1800,1760 1800,150 200,150 200,1760
no net on Bottom Layer "Bottom Layer-No Net" (solid, pour order 1001): 2100,1760 3700,1760 3700,150 2100,150 2100,1760

## Other copper
Top Layer:
  region: 2913,3276 2913,3351 2878,3351 2878,3276
  region: 2883,3341 2883,3421 2818,3421 2818,3341
  region: 2343,2499 2343,2650 2063,2650 2063,2499
  region: 2430,2813 2430,2913 2378,2913 2378,2813
  region: 2497,2793 2497,2840 2403,2840 2403,2793
  region: 2853,3316 2853,3356 2733,3356 2733,3316
  region: 2878,3306 2878,3351 2843,3351 2843,3306
  region: 2913,3371 2913,3436 2828,3436 2828,3371
  region: 2922.28,3336 2922.28,3411.72 2858,3411.72 2858,3336
  region: 2922.28,3256 2922.28,3336 2878,3336 2878,3256
  region: 967.28,3256 967.28,3336 923,3336 923,3256
  region: 967.28,3336 967.28,3411.72 903,3411.72 903,3336
  region: 958,3371 958,3436 873,3436 873,3371
  region: 923,3306 923,3351 888,3351 888,3306
  region: 898,3316 898,3356 778,3356 778,3316
  region: 542,2793 542,2840 448,2840 448,2793
  region: 475,2813 475,2913 423,2913 423,2813
  region: 388,2499 388,2650 108,2650 108,2499
  region: 928,3341 928,3421 863,3421 863,3341
  region: 958,3276 958,3351 923,3351 923,3276
  rectangle: 1333,1225 1484,1530
  rectangle: 3233,1225 3384,1530
Bottom Layer:
  region: 2348,2416 2348,2651 2058,2651 2058,2416
  region: 393,2416 393,2651 103,2651 103,2416
  rectangle: 1295,1225 1500,1530
  rectangle: 3195,1225 3400,1530

## Silkscreen, mask and mechanical layers (free items; w line width, h text height)
Mechanical 1:
  lines w10: 0,0 3937.01,0 3937.01,3937.01 0,3937.01 0,0 ; 100,2165 100,3665 1910,3665 1910,2165 100,2165 ; 200,150 200,1760 1800,1760 1800,150 200,150 ; 2055,2165 3865,2165 3865,3665 2055,3665 2055,2165 ; 2100,150 3700,150 3700,1760 2100,1760 2100,150

## Text inside footprints (layer, text, board x,y; h text height)
Wi-Fi1: Bottom Overlay "Wi-Fi" at 464,3050 h118.11 r180
Wi-Fi1: Bottom Overlay "Wi-Fi" at 2419,3050 h118.11 r180